# EAGLE board ESD3_BreakOut_V1 (EAGLE 5.09)
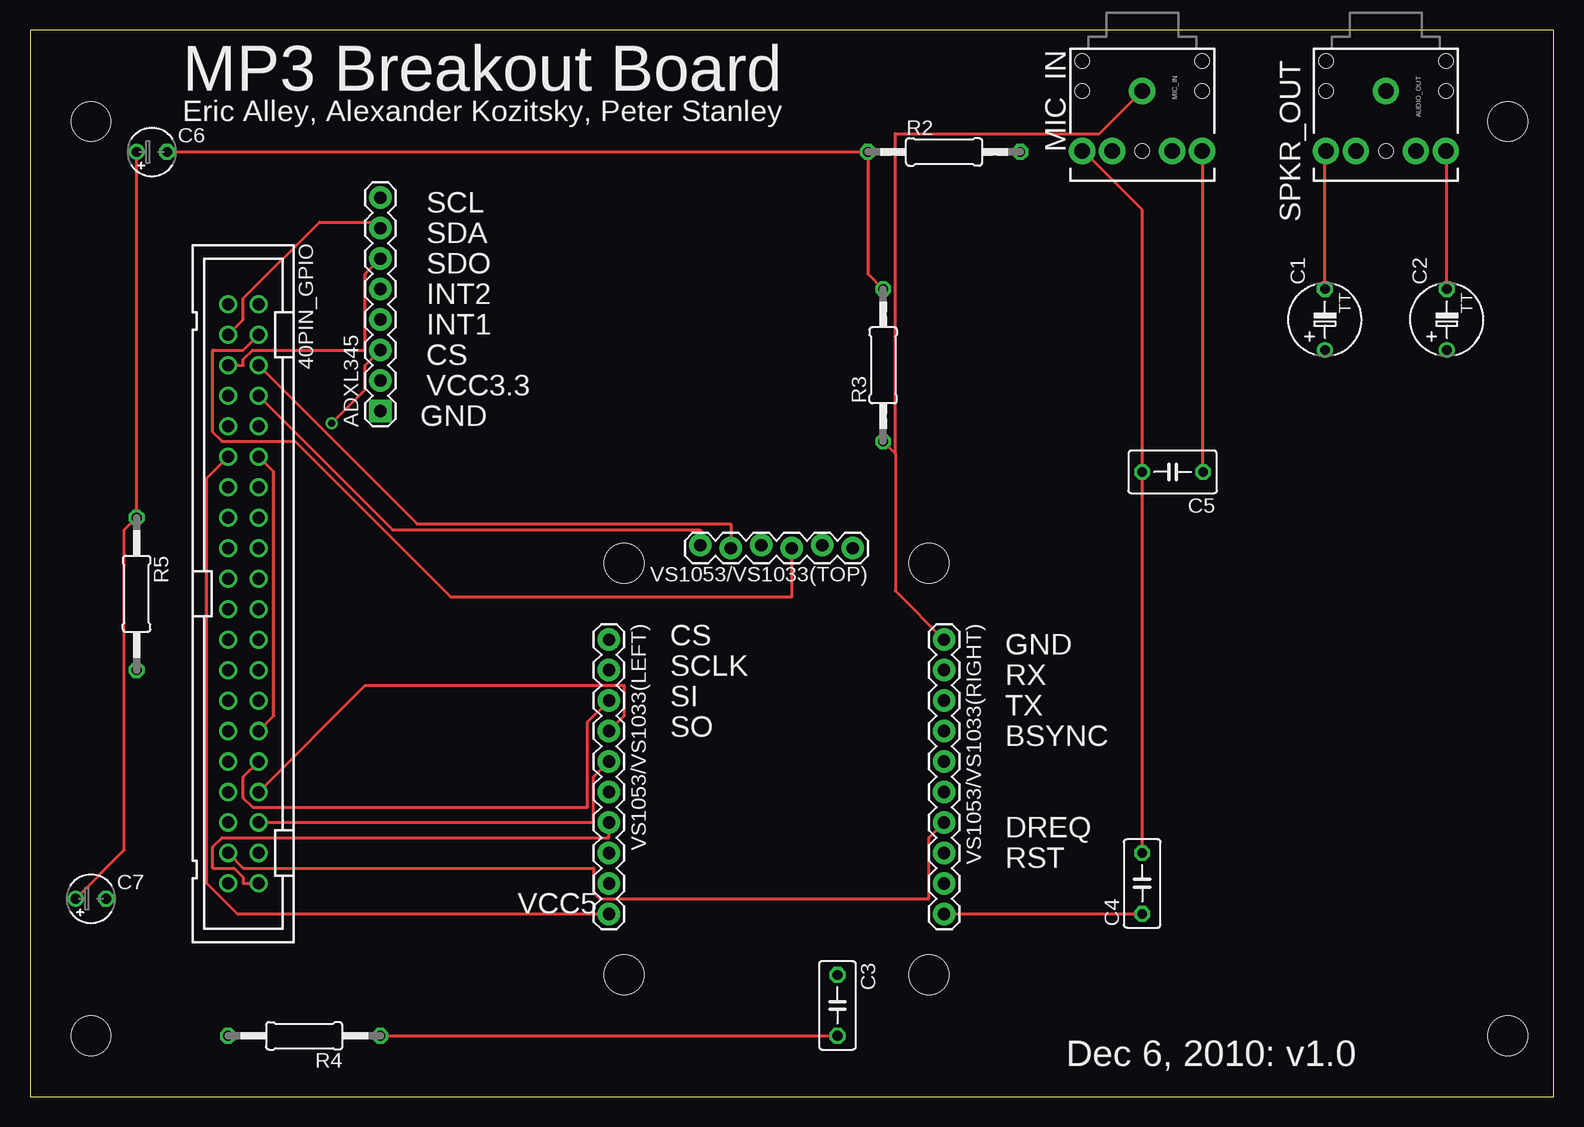
[diagram p0: board, top side]
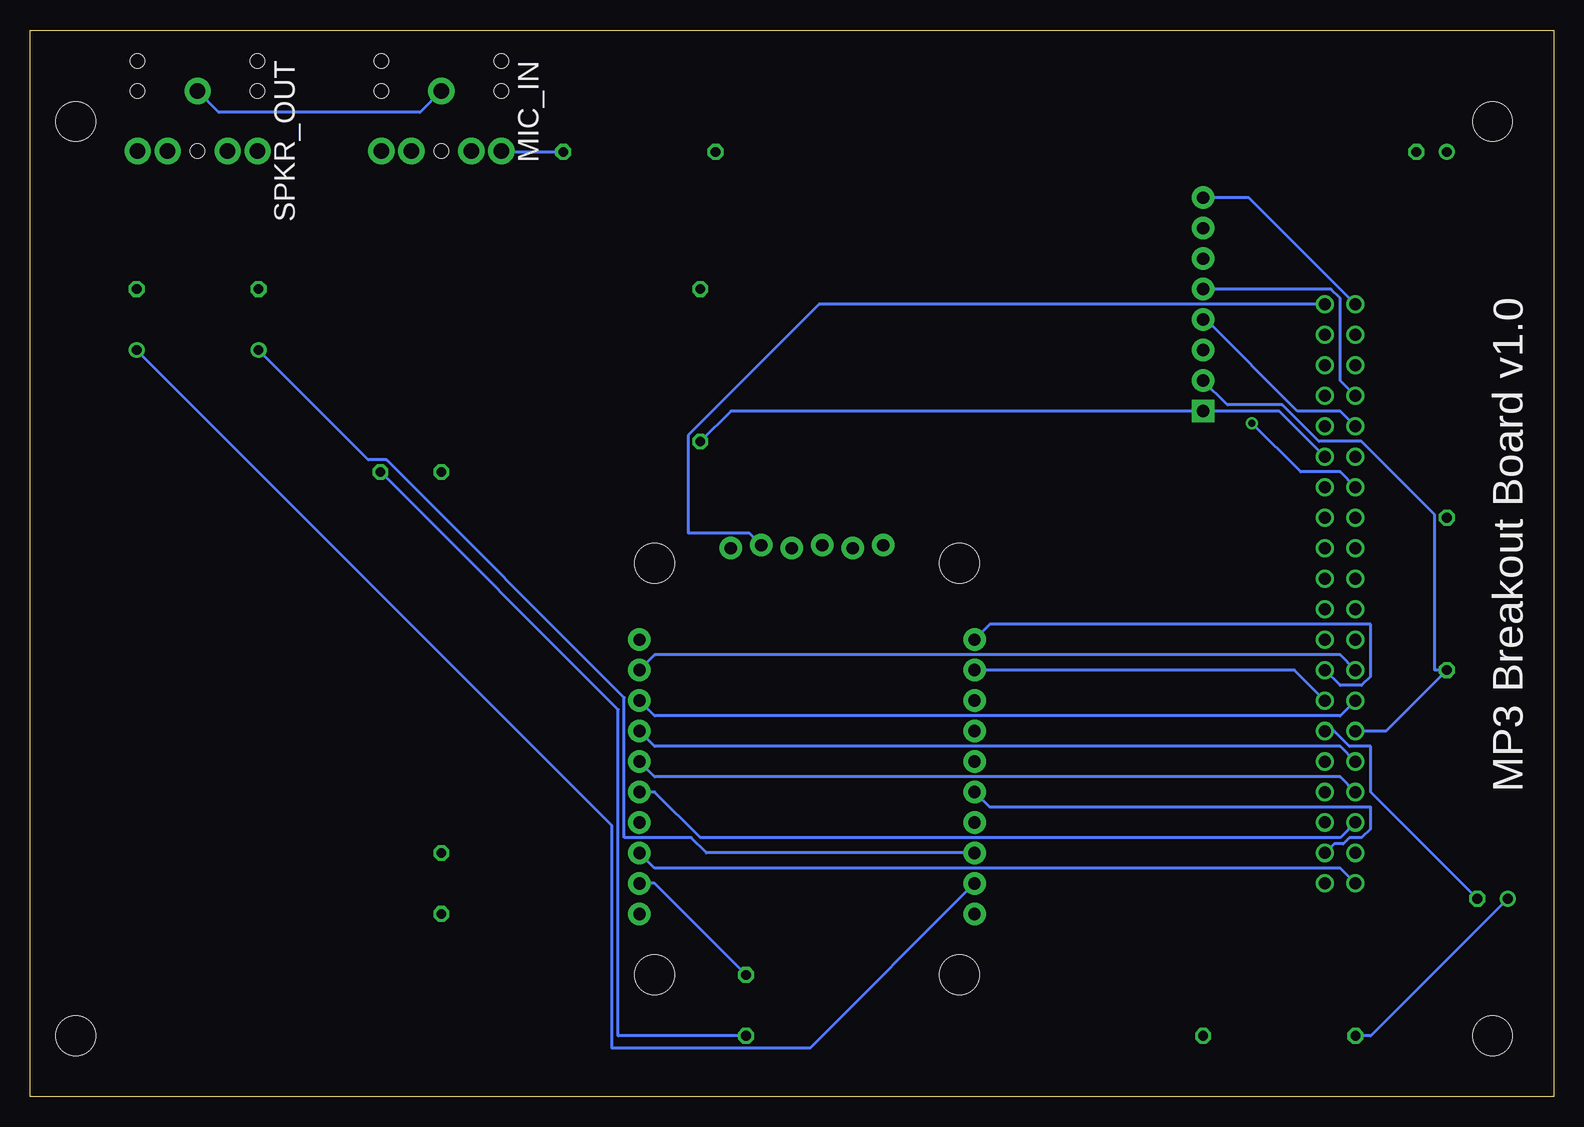
[diagram p1: board, bottom side, seen from below]

Size 127 x 88.9 mm. Coordinates in mm from the lower left corner, seen from the top.
Outline: 0,0 127,0 127,88.9 0,88.9 0,0
Copper layers (1*16): Top 0.035mm / dielectric 1.5mm / Bottom 0.035mm
Design rules "default": minimum track width 10mil, minimum drill 24mil, track to track 8mil, track to pad 8mil, pad to pad 8mil, via to via 8mil, smd to smd 8mil, copper to edge 40mil, drill to drill 8mil, minimum pad ring 10mil, minimum via ring 8mil, stop-mask expansion 4mil, vias tented up to drill 0mil, thermal gap 10mil

## Footprints (pad centres in the part's own frame; a part is rotated, then mirrored left to right if it is on the bottom)
PAK100/2500-40 = drill 1 pad 1.422 round: 1 -24.13,-1.27; 2 -24.13,1.27; 3 -21.59,-1.27; 4 -21.59,1.27; 5 -19.05,-1.27; 6 -19.05,1.27; 7 -16.51,-1.27; 8 -16.51,1.27; 9 -13.97,-1.27; 10 -13.97,1.27; 11 -11.43,-1.27; 12 -11.43,1.27; 13 -8.89,-1.27; 14 -8.89,1.27; 15 -6.35,-1.27; 16 -6.35,1.27; 17 -3.81,-1.27; 18 -3.81,1.27; 19 -1.27,-1.27; 20 -1.27,1.27; 21 1.27,-1.27; 22 1.27,1.27; 23 3.81,-1.27; 24 3.81,1.27; 25 6.35,-1.27; 26 6.35,1.27; 27 8.89,-1.27; 28 8.89,1.27; 29 11.43,-1.27; 30 11.43,1.27; 31 13.97,-1.27; 32 13.97,1.27; 33 16.51,-1.27; 34 16.51,1.27; 35 19.05,-1.27; 36 19.05,1.27; 37 21.59,-1.27; 38 21.59,1.27; 39 24.13,-1.27; 40 24.13,1.27
1X08 = drill 1.016 pad 1.88 square: 1 0,0 | drill 1.016 pad 1.88 round: 2 2.54,0; 3 5.08,0; 4 7.62,0; 5 10.16,0; 6 12.7,0; 7 15.24,0; 8 17.78,0
AUDIO-JACK = drill 1.3 pad 2.184 round: 1 0,0; 2 5,5; 3 5,2.5; 4 5,-2.5; 5 5,-5 | hole 1.2: 0,5; -2.5,5; -2.5,-5; 0,-5; 5,0
TT5D6 = drill 0.813 round: + -2.54,0 | drill 0.813 octagon: - 2.54,0
C050-030X075 = drill 0.813 octagon: 1 -2.54,0; 2 2.54,0
C050-035X075 = drill 0.813 octagon: 1 -2.54,0; 2 2.54,0
TT2D4 = drill 0.813 round: + -1.27,0 | drill 0.813 octagon: - 1.27,0
STAND-OFF = hole 3.302: 0,0
0207/12 = drill 0.813 octagon: 1 -6.35,0; 2 6.35,0
1X10 = drill 1.016 pad 1.88 round: 1 0,0; 2 2.54,0; 3 5.08,0; 4 7.62,0; 5 10.16,0; 6 12.7,0; 7 15.24,0; 8 17.78,0; 9 20.32,0; 10 22.86,0
1X06-SIP_LOCK = drill 1.016 pad 1.88 round: 1 0,0; 2 2.54,-0.254; 3 5.08,0; 4 7.62,-0.254; 5 10.16,0; 6 12.7,-0.254

## Placement (x,y rotation side)
40PIN_GPIO  2540-  [PAK100/2500-40]  17.78,41.91 270 top
ADXL345  [1X08]  29.21,57.15 90 top
AUDIO_OUT  AUDIO-JACKPTH  [AUDIO-JACK]  113.03,83.82 270 top
C1  100uF  [TT5D6]  107.95,64.77 90 top
C2  100uF  [TT5D6]  118.11,64.77 90 top
C3  1uF  [C050-030X075]  67.31,7.62 270 top
C4  1uF  [C050-030X075]  92.71,17.78 90 top
C5  100uF  [C050-035X075]  95.25,52.07 180 top
C6  10uF  [TT2D4]  10.16,78.74 0 top
C7  10uF  [TT2D4]  5.08,16.51 0 top
JP1  STAND-OFF  [STAND-OFF]  49.53,44.45 0 top
JP2  STAND-OFF  [STAND-OFF]  123.19,81.28 0 top
JP3  STAND-OFF  [STAND-OFF]  123.19,5.08 0 top
JP4  STAND-OFF  [STAND-OFF]  5.08,81.28 0 top
JP5  STAND-OFF  [STAND-OFF]  74.93,10.16 0 top
JP6  STAND-OFF  [STAND-OFF]  74.93,44.45 0 top
JP7  STAND-OFF  [STAND-OFF]  49.53,10.16 0 top
JP8  STAND-OFF  [STAND-OFF]  5.08,5.08 0 top
MIC_IN  AUDIO-JACKPTH  [AUDIO-JACK]  92.71,83.82 270 top
R2  1k  [0207/12]  76.2,78.74 0 top
R3  1k  [0207/12]  71.12,60.96 90 top
R4  1k  [0207/12]  22.86,5.08 180 top
R5  1k  [0207/12]  8.89,41.91 270 top
VS1053/VS1033(LEFT)  M10"  [1X10]  48.26,38.1 270 top
VS1053/VS1033(RIGHT)  M10"  [1X10]  76.2,38.1 270 top
VS1053/VS1033(TOP)  [1X06-SIP_LOCK]  68.58,45.72 180 top

## Library data of the parts
40PIN_GPIO = con-3m
ADXL345 AUDIO_OUT JP1-JP8 MIC_IN VS1053/VS1033(LEFT) VS1053/VS1033(RIGHT) VS1053/VS1033(TOP) = SparkFun
C1-C7 R2-R5 = resistor

## Nets
BSYNC: 40PIN_GPIO.31 VS1053/VS1033(RIGHT).4
DREQ: 40PIN_GPIO.37 VS1053/VS1033(RIGHT).7
GND: 40PIN_GPIO.12 40PIN_GPIO.30 ADXL345.1 AUDIO_OUT.1 C7.- MIC_IN.1 R3.1 VS1053/VS1033(RIGHT).1
GPIO2: 40PIN_GPIO.2 VS1053/VS1033(TOP).2
GPIO4: 40PIN_GPIO.4 VS1053/VS1033(TOP).3
GPIO6: 40PIN_GPIO.6 VS1053/VS1033(TOP).5
GPIO8: 40PIN_GPIO.8 VS1053/VS1033(TOP).6
GPIO33: 40PIN_GPIO.33 VS1053/VS1033(RIGHT).5
GPIO35: 40PIN_GPIO.35 VS1053/VS1033(RIGHT).6
LEFT: C1.+ VS1053/VS1033(LEFT).8
N$1: AUDIO_OUT.5 C1.-
N$2: AUDIO_OUT.2 C2.-
N$3: 40PIN_GPIO.40 VS1053/VS1033(LEFT).7
N$4: 40PIN_GPIO.38 VS1053/VS1033(LEFT).6
N$5: 40PIN_GPIO.36 VS1053/VS1033(LEFT).5
N$6: 40PIN_GPIO.34 VS1053/VS1033(LEFT).4
N$7: C4.1 VS1053/VS1033(RIGHT).10
N$8: 40PIN_GPIO.32 VS1053/VS1033(LEFT).3
N$9: 40PIN_GPIO.28 VS1053/VS1033(LEFT).2
N$10: 40PIN_GPIO.26 VS1053/VS1033(LEFT).1
N$11: C3.1 VS1053/VS1033(RIGHT).9
N$12: C3.2 C5.1 MIC_IN.2 R4.1
N$13: C4.2 C5.2 MIC_IN.5 R2.2
N$14: C6.+ C7.+ R4.2 R5.1
N$15: 40PIN_GPIO.1 ADXL345.8
N$16: 40PIN_GPIO.3 ADXL345.7
N$17: C6.- R2.1 R3.2
N$18: 40PIN_GPIO.5 ADXL345.6
N$19: 40PIN_GPIO.7 ADXL345.5
N$20: 40PIN_GPIO.9 ADXL345.4
N$21: 40PIN_GPIO.13 ADXL345.3
RESET: 40PIN_GPIO.39 VS1053/VS1033(RIGHT).8
RIGHT: C2.+ VS1053/VS1033(LEFT).9
RX: 40PIN_GPIO.25 VS1053/VS1033(RIGHT).2
TX: 40PIN_GPIO.27 VS1053/VS1033(RIGHT).3
VCC5: 40PIN_GPIO.11 VS1053/VS1033(LEFT).10
VCC33: 40PIN_GPIO.29 ADXL345.2 R5.2

## Tracks (layer width: path | path; a pad name or v marks a point on that pad's centre or on a via)
BSYNC
  Bottom 0.254: 40PIN_GPIO.31 17.78,29.21 74.93,29.21 VS1053/VS1033(RIGHT).4
DREQ
  Top 0.254: 40PIN_GPIO.37 17.78,19.05 46.99,19.05 46.99,17.02 47.5,16.51 74.93,16.51 74.93,21.59 VS1053/VS1033(RIGHT).7
GND
  Top 0.254: R3.1 72.14,53.59 | 72.14,53.59 72.14,42.16 VS1053/VS1033(RIGHT).1 | 40PIN_GPIO.12 20.32,52.07 20.32,31.75 40PIN_GPIO.30 | MIC_IN.1 89.15,80.26 72.14,80.26 72.14,53.59
  Bottom 0.254: MIC_IN.1 94.49,82.04 111.25,82.04 AUDIO_OUT.1 | 40PIN_GPIO.12 22.86,57.15 ADXL345.1 68.58,57.15 R3.1 | C7.- 15.24,25.4 15.24,29.21 17.02,29.21 18.29,30.48 40PIN_GPIO.30
GPIO2
  Bottom 0.254: 40PIN_GPIO.2 61.21,66.04 72.14,55.12 72.14,46.99 67.06,46.99 VS1053/VS1033(TOP).2
GPIO4
  Top 0.254: 40PIN_GPIO.4 17.78,62.23 15.24,62.23 15.24,55.37 16,54.61 22.1,54.61 35.05,41.66 63.5,41.66 VS1053/VS1033(TOP).3
GPIO6
  Top 0.254: 40PIN_GPIO.6 32.26,47.75 58.42,47.75 VS1053/VS1033(TOP).5
GPIO8
  Top 0.254: 40PIN_GPIO.8 30.23,47.24 55.88,47.24 VS1053/VS1033(TOP).6
GPIO33
  Bottom 0.254: 40PIN_GPIO.33 17.78,26.67 74.93,26.67 VS1053/VS1033(RIGHT).5
GPIO35
  Bottom 0.254: 40PIN_GPIO.35 17.78,21.59 71.12,21.59 74.93,25.4 VS1053/VS1033(RIGHT).6
LEFT
  Bottom 0.254: C1.+ 98.81,53.09 97.28,53.09 77.47,33.27 77.47,21.59 71.88,21.59 70.61,20.32 VS1053/VS1033(LEFT).8
N$1
  Top 0.254: C1.- 107.95,78.74 AUDIO_OUT.5
N$2
  Top 0.254: C2.- 118.11,78.74 AUDIO_OUT.2
N$3
  Top 0.254: 40PIN_GPIO.40 17.78,17.78 17.78,18.29 17.02,19.05 15.24,19.05 15.24,20.83 16,21.59 48.26,21.59 VS1053/VS1033(LEFT).7
N$4
  Bottom 0.254: 40PIN_GPIO.38 18.29,21.08 17.53,21.08 17.02,21.59 16,21.59 15.24,22.35 15.24,24.13 46.99,24.13 VS1053/VS1033(LEFT).6
N$5
  Top 0.254: 40PIN_GPIO.36 46.99,22.86 46.99,26.67 VS1053/VS1033(LEFT).5
N$6
  Top 0.254: 40PIN_GPIO.34 27.94,34.29 49.53,34.29 49.53,31.75 VS1053/VS1033(LEFT).4
N$7
  Top 0.254: VS1053/VS1033(RIGHT).10 C4.1
N$8
  Top 0.254: 40PIN_GPIO.32 17.78,26.67 17.78,24.89 18.54,24.13 46.48,24.13 46.48,31.24 VS1053/VS1033(LEFT).3
N$9
  Bottom 0.254: 40PIN_GPIO.28 21.59,35.56 VS1053/VS1033(LEFT).2
N$10
  Bottom 0.254: 40PIN_GPIO.26 17.78,34.29 16,34.29 15.24,35.05 15.24,39.37 46.99,39.37 VS1053/VS1033(LEFT).1
N$11
  Bottom 0.254: C3.1 74.93,17.78 VS1053/VS1033(RIGHT).9
N$12
  Top 0.254: C5.1 97.79,78.74 MIC_IN.2 | R4.1 C3.2
  Bottom 0.254: C5.1 77.98,32.26 77.98,5.08 C3.2
N$13
  Top 0.254: C4.2 C5.2 92.71,73.91 87.88,78.74 MIC_IN.5
  Bottom 0.254: R2.2 87.63,78.74 MIC_IN.5
N$14
  Top 0.254: C6.+ R5.1 7.87,47.24 7.87,20.57 C7.+
  Bottom 0.254: C7.+ 15.24,5.08 R4.2
N$15
  Bottom 0.254: 40PIN_GPIO.1 25.4,74.93 ADXL345.8
N$16
  Top 0.254: 40PIN_GPIO.3 17.78,64.77 17.78,66.55 24.13,72.9 29.21,72.9 ADXL345.7
N$17
  Top 0.254: C6.- R2.1 69.85,68.58 R3.2
N$18
  Top 0.254: 40PIN_GPIO.5 17.78,60.96 17.78,61.47 18.54,62.23 27.94,62.23 27.94,68.58 ADXL345.6
N$19
  Bottom 0.254: 40PIN_GPIO.7 17.78,59.69 17.78,66.55 18.54,67.31 ADXL345.5
N$20
  Bottom 0.254: 40PIN_GPIO.9 17.78,57.15 21.34,57.15 28.96,64.77 ADXL345.4
N$21  (via drill 0.61)
  Top 0.254: v25.15,56.13 27.94,58.93 27.94,60.96 ADXL345.3
  Bottom 0.254: 40PIN_GPIO.13 17.78,52.07 21.08,52.07 v25.15,56.13
RESET
  Bottom 0.254: 40PIN_GPIO.39 17.78,19.05 74.93,19.05 VS1053/VS1033(RIGHT).8
RIGHT
  Bottom 0.254: C2.+ 78.49,22.61 78.49,4.06 61.98,4.06 VS1053/VS1033(LEFT).9
RX
  Bottom 0.254: 40PIN_GPIO.25 17.78,36.83 74.93,36.83 VS1053/VS1033(RIGHT).2
TX
  Bottom 0.254: 40PIN_GPIO.27 17.78,31.75 74.93,31.75 VS1053/VS1033(RIGHT).3
VCC5
  Top 0.254: 40PIN_GPIO.11 14.73,51.56 14.73,17.78 17.27,15.24 VS1053/VS1033(LEFT).10
VCC33
  Bottom 0.254: 40PIN_GPIO.29 13.97,30.48 R5.2 9.91,35.56 9.91,48.51 16,54.61 19.56,54.61 22.61,57.66 27.18,57.66 ADXL345.2

## Text on the board
tPlace: SPKR_OUT | MP3 Breakout Board | Eric Alley, Alexander Kozitsky, Peter Stanley | MIC_IN | SCL | SDA | SDO | INT2 | INT1 | CS | VCC3.3 | GND | CS | GND | SCLK | RX | SI | TX | SO | BSYNC | DREQ | RST | VCC5 | Dec 6, 2010: v1.0
bPlace: MIC_IN | SPKR_OUT | MP3 Breakout Board v1.0